# EAGLE board Mother-panelized (EAGLE 7.4.0)
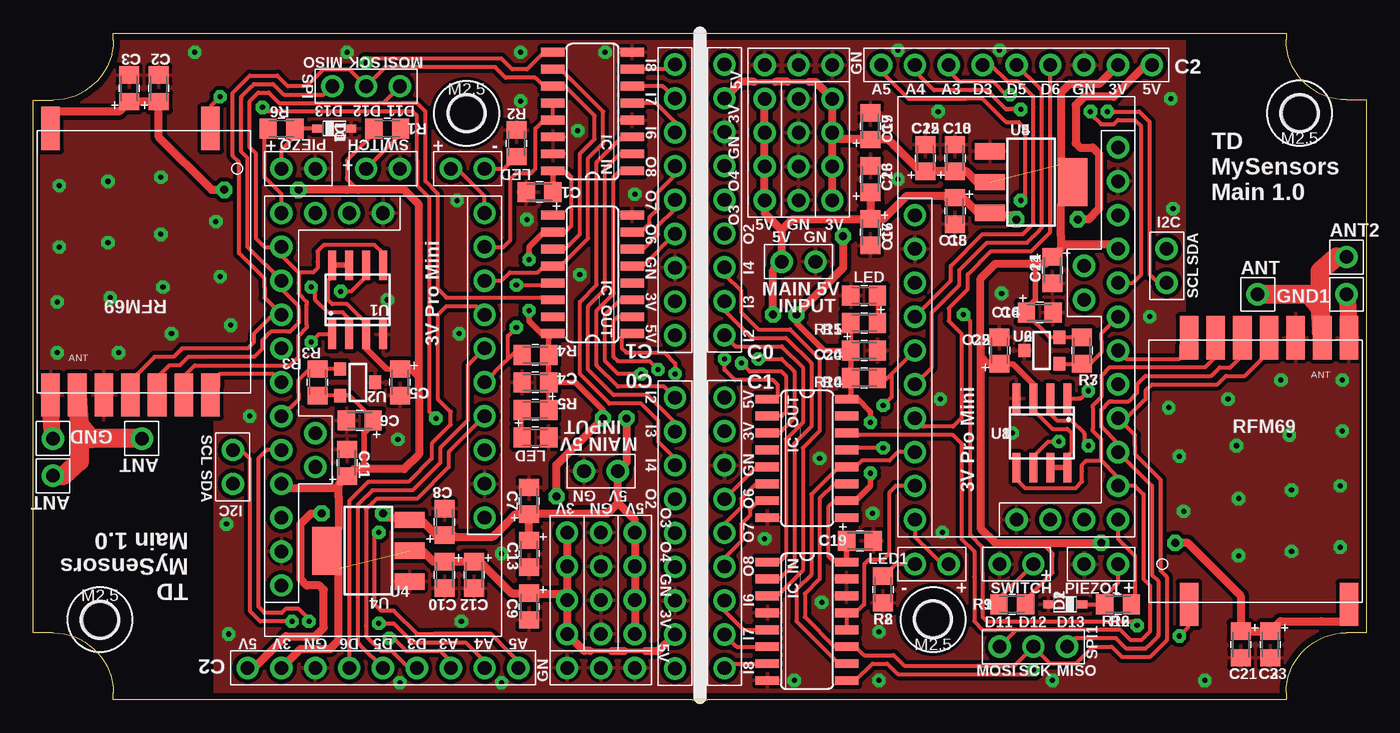
[diagram p0: board, top side]
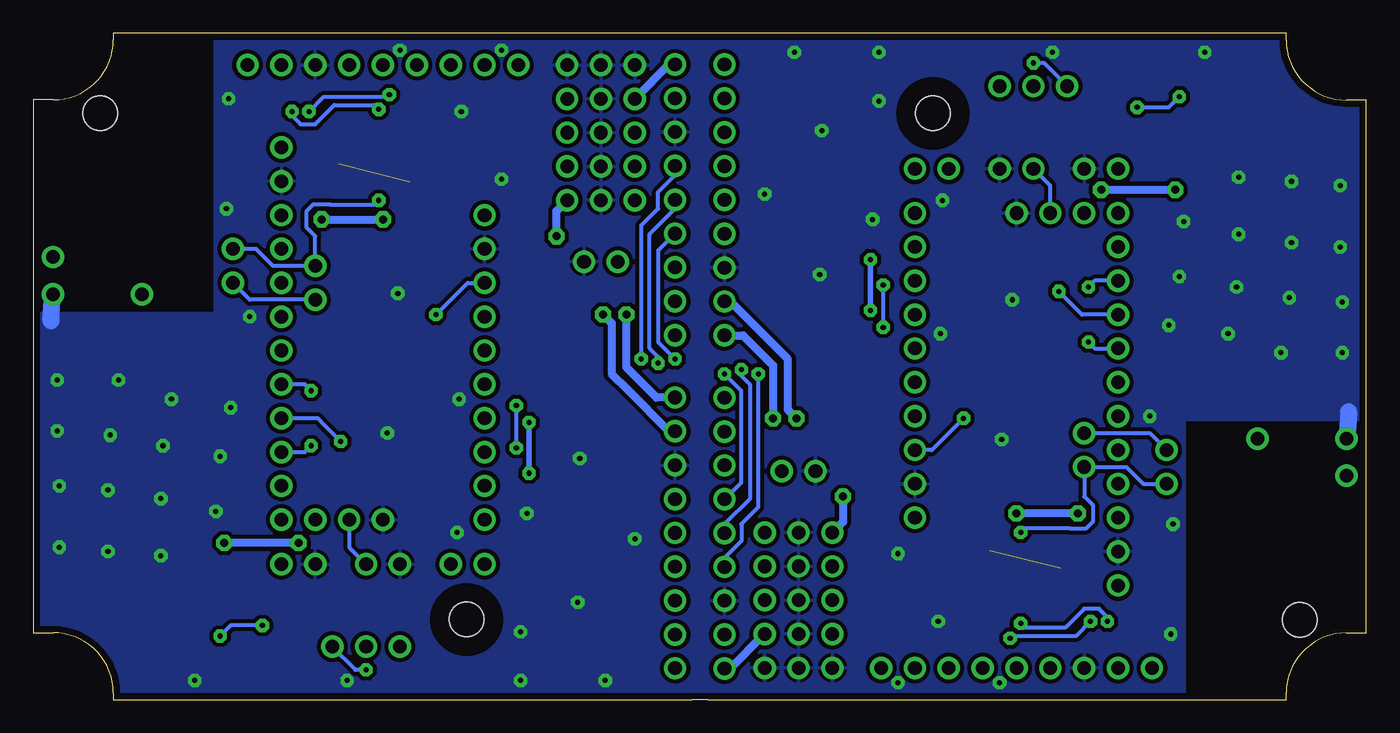
[diagram p1: board, bottom side, seen from below]

Size 100 x 50 mm. Coordinates in mm from the lower left corner, seen from the top.
Outline: 6,49.49 arc-90 1.5,44.99 0,44.99 0,4.99 1.5,4.99 arc-90 6,0.49 6,0 49.41,0 50.59,0 94,0 94,0.51 arc-90 98.5,5.01 100,5.01 100,45.01 98.5,45.01 arc-90 94,49.51 94,50 50.59,50 49.41,50 6,50 6,49.49
Copper layers (1*2*15*16): Top 0.035mm / dielectric 0.2mm / layer 2 0.035mm / dielectric 1.2mm / layer 15 0.035mm / dielectric 0.2mm / Bottom 0.035mm
Design rules "Elecrow_PCB_eagle_rule": minimum track width 6mil, minimum drill 12mil, track to track 6mil, track to pad 8mil, pad to pad 12mil, via to via 6mil, smd to smd 0mil, copper to edge 20mil, drill to drill 10mil, minimum pad ring 6mil, minimum via ring 6mil, stop-mask expansion 0mil, vias tented up to drill 100mil, thermal gap 10mil

## Footprints (pad centres in the part's own frame; a part is rotated, then mirrored left to right if it is on the bottom)
DUPONT_1 = drill 1.016 pad 1.676: 1 0,0
CAP_0805 = smd 1.3 x 1.5: 1 -1,0; 2 1,0
SOD323 = smd 0.8 x 0.6: A 1.25,0; C -1.25,0
HOLE_M2.5PAN_TIGHT = hole 2.6: 0,0
DUPONT_2 = drill 1.016 pad 1.676: 1 -1.27,0; 2 1.27,0
SO16 = smd 0.66 x 1.75: 1 -4.445,-2.973; 2 -3.175,-2.973; 3 -1.905,-2.973; 4 -0.635,-2.973; 5 0.635,-2.973; 6 1.905,-2.973; 7 3.175,-2.973; 8 4.445,-2.973; 9 4.445,2.973; 10 3.175,2.973; 11 1.905,2.973; 12 0.635,2.973; 13 -0.635,2.973; 14 -1.905,2.973; 15 -3.175,2.973; 16 -4.445,2.973
DUPONT_4 = drill 1.016 pad 1.676: 1 -3.81,0; 2 -1.27,0; 3 1.27,0; 4 3.81,0
DUPONT_3 = drill 1.016 pad 1.676: 1 -2.54,0; 2 0,0; 3 2.54,0
LED_0805 = smd 1.3 x 1.5: 1 -1,0; 2 1,0
R_0805 = smd 1.3 x 1.5: 1 -1,0; 2 1,0
SO-08 = smd 0.6 x 2.2: 1 -1.905,-2.6; 2 -0.635,-2.6; 3 0.635,-2.6; 4 1.905,-2.6; 5 1.905,2.6; 6 0.635,2.6; 7 -0.635,2.6; 8 -1.905,2.6
SOT23-3 = smd 1 x 0.9: 1 -1,-1.3; 2 1,-1.3; 3 0,1.3
PRO_MINI_CLONE = drill 1.016 pad 1.676: P$1 0,22.86; P$2 0,20.32; P$3 0,17.78; P$4 0,15.24; P$5 0,12.7; P$6 0,10.16; P$7 0,7.62; P$8 0,5.08; P$9 0,2.54; P$10 0,0; P$11 15.24,0; P$12 15.24,2.54; P$13 15.24,5.08; P$14 15.24,7.62; P$15 15.24,10.16; P$16 15.24,12.7; P$17 15.24,15.24; P$18 15.24,17.78; P$19 15.24,20.32; P$20 15.24,22.86; P$21 15.24,25.4; P$22 15.24,27.94; P$23 12.7,16.51; P$24 12.7,19.05; P$25 12.7,0; P$26 10.16,0; P$27 7.62,0
SOT223 = smd 1.219 x 2.235: 1 -2.311,-3.099; 2 0,-3.099; 3 2.311,-3.099 | smd 3.6 x 2.2: 4 0,3.099
DUPONT_MALE90_9 = drill 1.016 pad 1.676: 1 -10.16,0; 2 -7.62,0; 3 -5.08,0; 4 -2.54,0; 5 0,0; 6 2.54,0; 7 5.08,0; 8 7.62,0; 9 10.16,0
RFM69W_MS = smd 3.25 x 1.4: 2 -10,5; 8 -10,-7; 9 10,-7; 10 10,-5; 11 10,-3; 12 10,-1; 13 10,1; 14 10,3; 15 10,5
DUPONT_9 = drill 1.016 pad 1.676: 1 -10.16,0; 2 -7.62,0; 3 -5.08,0; 4 -2.54,0; 5 0,0; 6 2.54,0; 7 5.08,0; 8 7.62,0; 9 10.16,0

## Placement (x,y rotation side)
ANT  [DUPONT_1]  1.47,16.79 180 top
ANT1  [DUPONT_1]  8.14,19.58 180 top
ANT2  [DUPONT_1]  98.53,33.21 0 top
ANT3  [DUPONT_1]  91.86,30.42 0 top
C1  0.1uF  [CAP_0805]  37.98,38.09 180 top
C2  10uF  [CAP_0805]  9.41,45.87 90 top
C3  0.1uF  [CAP_0805]  7.19,45.87 90 top
C4  0.1uF  [CAP_0805]  37.67,23.81 180 top
C5  0.1uF  [CAP_0805]  27.51,23.81 270 top
C6  0.1uF  [CAP_0805]  24.49,20.95 180 top
C7  10uF  [CAP_0805]  37.19,14.92 90 top
C8  0.1uF  [CAP_0805]  30.84,13.33 90 top
C9  10uF  [CAP_0805]  37.19,6.98 270 top
C10  0.1uF  [CAP_0805]  30.84,9.36 270 top
C11  10uF  [CAP_0805]  23.54,17.77 90 top
C12  10uF  [CAP_0805]  33.06,9.36 270 top
C13  10uF  [CAP_0805]  37.19,10.95 270 top
C14  0.1uF  [CAP_0805]  75.51,29.05 0 top
C15  0.1uF  [CAP_0805]  69.16,36.67 270 top
C16  10uF  [CAP_0805]  62.81,35.08 270 top
C17  10uF  [CAP_0805]  62.81,43.02 90 top
C18  0.1uF  [CAP_0805]  69.16,40.64 90 top
C19  0.1uF  [CAP_0805]  62.02,11.91 0 top
C20  0.1uF  [CAP_0805]  62.33,26.19 0 top
C21  10uF  [CAP_0805]  90.59,4.13 270 top
C22  0.1uF  [CAP_0805]  72.49,26.19 90 top
C23  0.1uF  [CAP_0805]  92.81,4.13 270 top
C24  10uF  [CAP_0805]  76.46,32.23 270 top
C25  10uF  [CAP_0805]  66.94,40.64 90 top
C26  10uF  [CAP_0805]  62.81,39.05 90 top
D1  [SOD323]  22.59,42.86 0 top
D2  [SOD323]  77.41,7.14 180 top
GND  [DUPONT_1]  1.47,19.58 180 top
GND1  [DUPONT_1]  98.53,30.42 0 top
H1  HOLE_MOUNTING_M2.5_TIGHT  [HOLE_M2.5PAN_TIGHT]  32.5,43.99 180 top
H2  HOLE_MOUNTING_M2.5_TIGHT  [HOLE_M2.5PAN_TIGHT]  5,5.99 180 top
H3  HOLE_MOUNTING_M2.5_TIGHT  [HOLE_M2.5PAN_TIGHT]  95,44.01 0 top
H4  HOLE_MOUNTING_M2.5_TIGHT  [HOLE_M2.5PAN_TIGHT]  67.5,6.01 0 top
I2C  [DUPONT_2]  14.97,17.46 270 top
I2C1  [DUPONT_2]  85.03,32.54 90 top
IC_IN  [SO16]  41.95,44.13 90 top
IC_IN1  [SO16]  58.05,5.87 270 top
IC_OUT  [SO16]  41.95,31.9 90 top
IC_OUT1  [SO16]  58.05,18.1 270 top
J3V1  [DUPONT_4]  40.05,8.72 90 top
J3V2  [DUPONT_4]  59.95,41.27 270 top
J5V  [DUPONT_4]  45.13,8.72 270 top
J5V1  [DUPONT_4]  54.87,41.27 90 top
JGN1  [DUPONT_4]  42.59,8.72 270 top
JGN2  [DUPONT_3]  42.59,2.38 180 top
JGN3  [DUPONT_3]  57.41,47.62 0 top
JGN4  [DUPONT_4]  57.41,41.27 90 top
JINP  [DUPONT_2]  42.59,17.14 180 top
JINP1  [DUPONT_2]  57.41,32.86 0 top
LED  [DUPONT_2]  32.59,39.84 0 top
LED1  [DUPONT_2]  67.41,10.16 180 top
LED_SYS  [LED_0805]  37.67,19.68 0 top
LED_SYS1  [LED_0805]  62.33,30.32 180 top
PIEZO  [DUPONT_2]  19.89,39.84 0 top
PIEZO1  [DUPONT_2]  80.11,10.16 180 top
R1  10K  [R_0805]  26.55,42.86 0 top
R2  1K  [R_0805]  36.24,41.74 270 top
R3  4.7K  [R_0805]  21.32,23.81 270 top
R4  10K  [R_0805]  37.67,25.87 180 top
R5  1K  [R_0805]  37.67,21.74 180 top
R6  220  [R_0805]  18.62,42.86 0 top
R7  4.7K  [R_0805]  78.68,26.19 90 top
R8  1K  [R_0805]  63.76,8.26 90 top
R9  10K  [R_0805]  73.44,7.14 180 top
R10  10K  [R_0805]  62.33,24.13 0 top
R11  1K  [R_0805]  62.33,28.26 0 top
R12  220  [R_0805]  81.38,7.14 180 top
SPI  [DUPONT_3]  24.97,46.03 180 top
SPI1  [DUPONT_3]  75.03,3.97 0 top
SWITCH  [DUPONT_2]  26.24,39.84 0 top
SWITCH1  [DUPONT_2]  73.76,10.16 180 top
U1  [SO-08]  24.33,30 0 top
U2  [SOT23-3]  24.33,23.81 270 top
U3  [PRO_MINI_CLONE]  33.86,36.51 180 top
U4  AMS1117  [SOT223]  25.13,11.17 90 top
U5  AMS1117  [SOT223]  74.87,38.83 270 top
U6  [SOT23-3]  75.67,26.19 90 top
U7  [PRO_MINI_CLONE]  66.14,13.49 0 top
U8  [SO-08]  75.67,20 180 top
U$1  [DUPONT_MALE90_9]  48.15,37.49 90 top
U$2  RADIO_RFM69W_MS  [RFM69W_MS]  8.3,32.85 270 top
U$3  [DUPONT_MALE90_9]  48.15,12.49 90 top
U$4  [DUPONT_9]  26.24,2.38 0 top
U$5  RADIO_RFM69W_MS  [RFM69W_MS]  91.7,17.14 90 top
U$6  [DUPONT_MALE90_9]  51.85,12.51 270 top
U$7  [DUPONT_MALE90_9]  51.85,37.51 270 top
U$8  [DUPONT_9]  73.76,47.62 180 top

## Library data of the parts
ANT ANT1-ANT3 C1-C26 D1 D2 GND GND1 H1-H4 I2C I2C1 IC_IN IC_IN1 IC_OUT IC_OUT1 J3V1 J3V2 J5V J5V1 JGN1-JGN4 JINP JINP1 LED LED1 LED_SYS LED_SYS1 PIEZO PIEZO1 R1-R12 SPI SPI1 SWITCH SWITCH1 U1-U8 U$1-U$8 = TD22057

## Nets
+3V1: C14.1 C17.1 C18.1 C19.1 C20.1 C21.1 C22.1 C23.1 C24.1 C25.1 IC_IN1.16 IC_OUT1.10 IC_OUT1.16 J3V2.1 J3V2.2 J3V2.3 J3V2.4 R7.2 R9.1 R10.1 R11.1 U5.2 U5.4 U6.2 U7.P$19 U8.3 U8.7 U8.8 U$5.8 U$6.2 U$7.2 U$8.2
+3V3: C1.1 C2.1 C3.1 C4.1 C5.1 C6.1 C9.1 C10.1 C11.1 C12.1 IC_IN.16 IC_OUT.10 IC_OUT.16 J3V1.1 J3V1.2 J3V1.3 J3V1.4 R1.1 R3.2 R4.1 R5.1 U1.3 U1.7 U1.8 U2.2 U3.P$19 U4.2 U4.4 U$1.2 U$2.8 U$3.2 U$4.2
+5V: C7.1 C8.1 C13.1 J5V.1 J5V.2 J5V.3 J5V.4 JINP.1 U4.3 U$1.1 U$3.1 U$4.1
+5V1: C15.1 C16.1 C26.1 J5V1.1 J5V1.2 J5V1.3 J5V1.4 JINP1.1 U5.3 U$6.1 U$7.1 U$8.1
ANALOG1: U7.P$18 U$8.7
ANALOG3: U3.P$18 U$4.7
CRYPT: R3.1 U2.1 U3.P$17
CRYPT1: R7.1 U6.1 U7.P$17
GND: C1.2 C2.2 C3.2 C4.2 C5.2 C6.2 C7.2 C8.2 C9.2 C10.2 C11.2 C12.2 C13.2 D1.A GND.1 IC_IN.4 IC_IN.8 IC_IN.14 IC_IN.15 IC_OUT.8 JGN1.1 JGN1.2 JGN1.3 JGN1.4 JGN2.1 JGN2.2 JGN2.3 JINP.2 LED_SYS.2 PIEZO.2 R2.1 SWITCH.2 U1.4 U2.3 U3.P$2 U3.P$21 U3.P$27 U4.1 U$1.3 U$2.9 U$2.11 U$3.3 U$4.3
GND1: C14.2 C15.2 C16.2 C17.2 C18.2 C19.2 C20.2 C21.2 C22.2 C23.2 C24.2 C25.2 C26.2 D2.A GND1.1 IC_IN1.4 IC_IN1.8 IC_IN1.14 IC_IN1.15 IC_OUT1.8 JGN3.1 JGN3.2 JGN3.3 JGN4.1 JGN4.2 JGN4.3 JGN4.4 JINP1.2 LED_SYS1.2 PIEZO1.2 R8.1 SWITCH1.2 U5.1 U6.3 U7.P$2 U7.P$21 U7.P$27 U8.4 U$5.9 U$5.11 U$6.3 U$7.3 U$8.3
INP1: IC_IN1.5 U$6.7
INP2: IC_IN.1 U$3.9
INP3: IC_IN.2 U$3.8
INP4: IC_IN.3 U$3.7
INP5: IC_IN1.7 U$6.9
INP6: IC_IN.5 U$1.7
INP7: IC_IN.6 U$1.8
INP8: IC_IN.7 U$1.9
INP9: IC_IN1.3 U$7.7
INP10: IC_IN1.1 U$7.9
INP11: IC_IN1.6 U$6.8
INP12: IC_IN1.2 U$7.8
IRQ: U3.P$4 U$4.6
IRQ1: U7.P$4 U$8.6
LED: LED.1 U3.P$10
LED1: LED1.1 U7.P$10
MEMORY_CS: U1.1 U3.P$15
MEMORY_CS1: U7.P$15 U8.1
MISO: IC_IN.9 SPI.3 U1.2 U3.P$13 U$2.13
MISO1: IC_IN1.9 SPI1.3 U7.P$13 U8.2 U$5.13
MOSI: IC_OUT.14 SPI.1 U1.5 U3.P$12 U$2.14
MOSI1: IC_OUT1.14 SPI1.1 U7.P$12 U8.5 U$5.14
N$1: LED.2 R2.2
N$2: LED_SYS.1 R5.2
N$3: D1.C PIEZO.1 R6.2
N$4: ANT2.1 ANT3.1 U$5.10
N$5: LED1.2 R8.2
N$6: LED_SYS1.1 R11.2
N$7: D2.C PIEZO1.1 R12.2
N$11: ANT1.1 ANT.1 U$2.10
OUT1: IC_OUT1.1 U$7.6
OUT2: IC_OUT.1 U$3.6
OUT3: IC_OUT.2 U$3.5
OUT4: IC_OUT.3 U$3.4
OUT5: IC_OUT1.2 U$7.5
OUT6: IC_OUT.5 U$1.4
OUT7: IC_OUT.6 U$1.5
OUT8: IC_OUT.7 U$1.6
OUT9: IC_OUT1.3 U$7.4
OUT10: IC_OUT1.5 U$6.4
OUT11: IC_OUT1.7 U$6.6
OUT12: IC_OUT1.6 U$6.5
PIEZO: R6.1 U3.P$11
PIEZO1: R12.1 U7.P$11
PWM1: U3.P$6 U$4.5
PWM2: U3.P$7 U$4.4
PWM3: U7.P$7 U$8.4
PWM4: U7.P$6 U$8.5
RADIO_CS: U3.P$16 U$2.15
RADIO_CS1: U7.P$16 U$5.15
RADIO_IRQ: U3.P$3 U$2.2
RADIO_IRQ1: U7.P$3 U$5.2
RAW: U3.P$22
RAW1: U7.P$22
SCK: IC_IN.11 IC_OUT.11 SPI.2 U1.6 U3.P$14 U$2.12
SCK1: IC_IN1.11 IC_OUT1.11 SPI1.2 U7.P$14 U8.6 U$5.12
SCL: I2C.2 U3.P$24 U$4.9
SCL1: I2C1.2 U7.P$24 U$8.9
SDA: I2C.1 U3.P$23 U$4.8
SDA1: I2C1.1 U7.P$23 U$8.8
SHIFT_CS: IC_IN.10 IC_OUT.12 U3.P$8
SHIFT_CS1: IC_IN1.10 IC_OUT1.12 U7.P$8
SHIFT_IN_LOAD: IC_IN.12 IC_IN.13 U3.P$9
SHIFT_IN_LOAD1: IC_IN1.12 IC_IN1.13 U7.P$9
SHIFT_OUT_ENABLE: IC_OUT.13 R4.2 U3.P$5
SHIFT_OUT_ENABLE1: IC_OUT1.13 R10.2 U7.P$5
SWITCH: R1.2 SWITCH.1 U3.P$26
SWITCH1: R9.2 SWITCH1.1 U7.P$26

## Tracks (layer width: path | path; a pad name or v marks a point on that pad's centre or on a via)
+3V1  (via drill 0.38 pad 0.99, 0.6 pad 1.21)  (1 unrouted)
  Top 0.305: U8.3 75.03,21.75 76.46,20.32 77.57,20.32 77.89,20 77.89,18.57 77.57,18.26 U8.8 | IC_OUT1.10 60.11,14.92 59.63,14.45 59.63,10.79 60.04,10.39 60.95,10.39 | R9.1 74.6,7.67 76.46,9.53 76.46,10.79 76.46,10.95 75.67,11.75 | 74.51,29.32 C14.1 74.51,28.94 76.14,27.3 76.25,27.19 U6.2 | 76.92,27.15 U6.2 | U6.2 R7.2 | R11.1 C20.1
  Top 0.356: 58.2,46.35 56.62,46.35 | 55.66,46.35 54.08,46.35
  Top 0.406: U8.8 U8.7 | v62.81,16.99 62.81,16.03 61.7,14.92 IC_OUT1.10 | 61.11,10.41 IC_IN1.16 | 60.95,10.39 IC_IN1.16 | v62.81,20.8 62.81,21.59 61.86,22.54 IC_OUT1.16 61.33,22.86 R10.1 C20.1 59.32,26.19 57.25,28.26 v57.25,28.89 | C19.1 IC_IN1.16 | C14.1 74.51,29.32 | 74.51,29.32 74.51,29.48 | 74.51,29.32 75.19,30 75.19,32.38 75.51,32.7 | U8.3 75.03,23.65 73.49,25.19 C22.1 71.75,25.19 71.06,25.88
  Top 0.61: J3V2.4 J3V2.3 59.95,42.07 J3V2.2 | J3V2.2 J3V2.1 58.68,46.35 58.2,46.35 | 98.61,7.3 U$5.8 98.84,7 98.84,6.51 98.21,5.87 96.62,5.87 93.56,5.87 C23.1 C21.1 90.59,7.78 86.62,11.75 v85.67,11.75 | 77.89,39.69 77.89,39.37 | 77.89,39.37 77.89,38.91 U5.4 | U5.4 77.73,38.59 77.73,37.78 77.1,37.15 77.1,34.77 77.1,33.97 | 77.25,38.11 U5.4 | v60.74,34.77 60.74,32.38 v57.25,28.89 | U5.2 70.81,38.83 70,39.64 C18.1 C25.1 66.51,39.64 64.56,41.59 64.13,42.02 C17.1 62.76,42.07 60.43,42.07 J3V2.2 | v80.11,11.75 76.46,11.75 75.67,11.75 72.17,11.75 71.06,12.86 71.06,25.88 71.06,26.04 71.06,27.15 71.06,31.59 72.17,32.7 75.03,32.7 75.35,32.7 75.51,32.7 75.94,32.7 C24.1 77.1,33.86 77.1,33.97 | U7.P$19 81.06,34.13 77.57,34.13 77.25,34.13 77.1,33.97 | U$8.2 79.95,46.2 77.73,46.2 77.1,45.56 77.1,40.16 77.89,39.37 | 56.62,46.35 55.66,46.35 | 54.08,46.35 53.08,46.35 U$7.2
  Bottom 0.406: v62.81,20.8 v62.81,16.99
  Bottom 0.61: v80.11,11.75 v85.67,11.75 | U$6.2 52.3,20.13 55.35,23.18 56.62,24.45 56.62,28.1 56.62,28.26 v57.25,28.89 | v60.74,34.77 60.74,36.67 J3V2.4
+3V3  (via drill 0.38 pad 0.99, 0.6 pad 1.21)  (1 unrouted)
  Top 0.305: U1.3 24.97,28.25 23.54,29.68 22.43,29.68 22.11,30 22.11,31.43 22.43,31.74 U1.8 | IC_OUT.10 39.89,35.08 40.37,35.55 40.37,39.2 39.96,39.61 39.05,39.61 | R1.1 25.4,42.33 23.54,40.48 23.54,39.2 23.54,39.05 24.33,38.25 | 25.49,20.68 C6.1 25.49,21.06 23.86,22.7 23.75,22.81 U2.2 | 23.08,22.85 U2.2 | U2.2 R3.2 | R5.1 C4.1
  Top 0.356: 41.8,3.65 43.38,3.65 | 44.34,3.65 45.92,3.65
  Top 0.406: U1.8 U1.7 | v37.19,33.01 37.19,33.97 38.3,35.08 IC_OUT.10 | 38.89,39.59 IC_IN.16 | 39.05,39.61 IC_IN.16 | v37.19,29.2 37.19,28.41 38.14,27.46 IC_OUT.16 38.67,27.14 R4.1 C4.1 40.68,23.81 42.75,21.74 v42.75,21.11 | C1.1 IC_IN.16 | C6.1 25.49,20.68 | 25.49,20.68 25.49,20.52 | 25.49,20.68 24.81,20 24.81,17.61 24.49,17.3 | U1.3 24.97,26.35 26.51,24.81 C5.1 28.25,24.81 28.94,24.12
  Top 0.61: J3V1.4 J3V1.3 40.05,7.93 J3V1.2 | J3V1.2 J3V1.1 41.32,3.65 41.8,3.65 | 1.39,42.7 U$2.8 1.16,43 1.16,43.49 1.79,44.13 3.38,44.13 6.44,44.13 C3.1 C2.1 9.41,42.22 13.38,38.25 v14.33,38.25 | 22.11,10.31 22.11,10.63 | 22.11,10.63 22.11,11.09 U4.4 | U4.4 22.27,11.41 22.27,12.22 22.9,12.85 22.9,15.23 22.9,16.03 | 22.75,11.89 U4.4 | v39.26,15.23 39.26,17.61 v42.75,21.11 | U4.2 29.19,11.17 30,10.36 C10.1 C12.1 33.49,10.36 35.45,8.41 35.87,7.98 C9.1 37.24,7.93 39.57,7.93 J3V1.2 | v19.89,38.25 23.54,38.25 24.33,38.25 27.82,38.25 28.94,37.14 28.94,24.12 28.94,23.96 28.94,22.85 28.94,18.41 27.82,17.3 24.97,17.3 24.65,17.3 24.49,17.3 24.06,17.3 C11.1 22.9,16.14 22.9,16.03 | U3.P$19 18.93,15.87 22.43,15.87 22.75,15.87 22.9,16.03 | U$4.2 20.05,3.8 22.27,3.8 22.9,4.44 22.9,9.84 22.11,10.63 | 43.38,3.65 44.34,3.65 | 45.92,3.65 46.92,3.65 U$3.2
  Bottom 0.406: v37.19,29.2 v37.19,33.01
  Bottom 0.61: v19.89,38.25 v14.33,38.25 | U$1.2 47.7,29.87 44.65,26.82 43.38,25.55 43.38,21.9 43.38,21.74 v42.75,21.11 | v39.26,15.23 39.26,13.33 J3V1.4
+5V  (via drill 0.6 pad 1.21)
  Top 0.61: J5V.2 J5V.3 J5V.4 J5V.1 45.13,13.49 43.86,14.76 | 43.86,14.76 JINP.1 44.49,17.77 v44.49,21.11 | v21.63,13.96 20.84,13.96 20.05,13.17 20.05,9.04 20.52,8.57 21.48,8.57 21.79,8.25 21.79,5.39 21.63,5.23 21.16,4.76 18.93,4.76 16.55,2.38 U$4.1 | v26.24,13.96 26.55,13.65 28.06,13.65 U4.3 29.09,13.49 30.25,12.33 C8.1 31.52,12.33 31.64,12.22 34.49,12.22 35.6,13.33 36.19,13.92 C7.1 | 43.86,14.76 43.06,13.96 37.56,13.96 C7.1 | C13.1 C7.1
  Bottom 0.61: U$1.1 46.75,27.33 44.49,25.08 v44.49,21.11 | v21.63,13.96 v26.24,13.96 | U$3.1 47.71,2.33 J5V.4
+5V1  (via drill 0.6 pad 1.21)
  Top 0.61: J5V1.2 J5V1.3 J5V1.4 J5V1.1 54.87,36.51 56.14,35.24 | 56.14,35.24 JINP1.1 55.51,32.23 v55.51,28.89 | v78.37,36.04 79.16,36.04 79.95,36.83 79.95,40.96 79.48,41.43 78.53,41.43 78.21,41.75 78.21,44.61 78.37,44.77 78.84,45.24 81.06,45.24 83.45,47.62 U$8.1 | v73.76,36.04 73.44,36.35 71.94,36.35 U5.3 70.91,36.51 69.75,37.67 C15.1 68.48,37.67 68.36,37.78 65.51,37.78 64.4,36.67 63.81,36.08 C16.1 | 56.14,35.24 56.94,36.04 62.44,36.04 C16.1 | C26.1 C16.1
  Bottom 0.61: U$6.1 53.25,22.67 55.51,24.92 v55.51,28.89 | v78.37,36.04 v73.76,36.04 | U$7.1 52.29,47.67 J5V1.4
ANALOG1  (via drill 0.38 pad 0.99)
  Top 0.305: v79.32,44.13 79.32,43.97 80.11,43.18 81.06,43.18 81.38,43.5 82.65,43.5 83.13,43.02 83.13,31.91 82.49,31.27 U7.P$18 | U$8.7 68.68,47.15 69.48,46.35 69.64,46.35 70.75,46.35 72.02,46.35 72.97,45.4 v73.29,45.4
  Bottom 0.305: v79.32,44.13 78.21,45.24 73.44,45.24 v73.29,45.4
ANALOG3  (via drill 0.38 pad 0.99)
  Top 0.305: v20.68,5.87 20.68,6.03 19.89,6.82 18.93,6.82 18.62,6.5 17.35,6.5 16.87,6.98 16.87,18.09 17.51,18.73 U3.P$18 | U$4.7 31.32,2.85 30.52,3.65 30.36,3.65 29.25,3.65 27.98,3.65 27.03,4.6 v26.71,4.6
  Bottom 0.305: v20.68,5.87 21.79,4.76 26.55,4.76 v26.71,4.6
CRYPT
  Top 0.305: U2.1 R3.1 | R3.1 21.05,24.81 | U3.P$17 19.89,22.54 19.89,23.01 19.89,23.96 20.84,24.92 21.2,24.92 R3.1
CRYPT1
  Top 0.305: U6.1 R7.1 | R7.1 78.95,25.19 | U7.P$17 80.11,27.46 80.11,26.99 80.11,26.04 79.16,25.08 78.8,25.08 R7.1
GND  (via drill 0.38 pad 0.99)
  Top 1.27: GND.1 1.31,21.58
  Bottom 1.27: 1.31,21.58 1.47,19.52
  other vias: 6.39,26.03 1.79,26.03 1.79,29.84 5.76,30.16 9.73,30.95 1.95,38.57 5.6,38.89 9.57,39.2 26.55,30 27.35,19.52 31.95,27.46 1.95,33.97 5.6,34.28 9.57,34.92 14.01,31.74 13.7,35.87 12.11,48.57 45.13,37.94 42.91,48.57 16.24,21.27 37.03,36.03 31.79,37.46 32.11,5.87 40.84,42.7 14.49,13.17 14.65,4.92 23.54,48.57 35.13,1.26 36.56,48.57 10.36,27.46 14.81,28.09 27.51,1.26 36.56,44.92 41,31.9 35.13,10.95
  pour Top (isolate 0.305): 50.53,0 50.53,50 5.96,50 5.96,49.05 arc-92 1.79,45.06 0,45.06 0,21.02 13.65,21.02 13.65,0
  pour Bottom (isolate 0.305): 50.53,0 50.53,50 5.96,50 5.96,49.05 arc-92 1.79,45.06 0,45.06 0,21.02 13.65,21.02 13.65,0
GND1  (via drill 0.38 pad 0.99)
  Top 1.27: GND1.1 98.69,28.42
  Bottom 1.27: 98.69,28.42 98.53,30.48
  other vias: 93.61,23.97 98.21,23.97 98.21,20.16 94.24,19.84 90.27,19.05 98.05,11.43 94.4,11.11 90.43,10.79 73.44,20 72.65,30.48 68.05,22.54 98.05,16.03 94.4,15.72 90.43,15.08 85.99,18.26 86.3,14.13 87.89,1.43 54.87,12.06 57.09,1.43 83.76,28.73 62.97,13.97 68.21,12.54 67.89,44.13 59.16,7.3 85.51,36.83 85.35,45.09 76.46,1.43 64.87,48.74 63.44,1.43 89.64,22.54 85.19,21.91 72.49,48.74 63.44,5.08 59,18.1 64.87,39.05
  pour Top (isolate 0.305): 50.59,50 50.59,0 94.04,0 94.04,0.95 arc-92 98.21,4.94 100,4.94 100,28.98 86.35,28.98 86.35,50
  pour Bottom (isolate 0.305): 50.59,50 50.59,0 94.04,0 94.04,0.95 arc-92 98.21,4.94 100,4.94 100,28.98 86.35,28.98 86.35,50
INP1
  Top 0.305: U$6.7 51.85,6.67 53.28,5.24 IC_IN1.5
INP2
  Top 0.305: IC_IN.1 44.02,39.68 43.54,39.2 43.54,30.47 42.27,29.2 42.27,25.08 43.86,23.49 47.31,23.49 U$3.9
INP3
  Top 0.305: 48.15,20.47 U$3.8 48.15,20.79 46.08,22.85 43.54,22.85 41.64,24.76 41.64,29.52 42.91,30.79 42.91,39.84 44.02,40.95 IC_IN.2
INP4
  Top 0.305: U$3.7 48.15,18.09 46.88,19.36 46.88,20.95 45.6,22.22 43.22,22.22 41,24.44 41,29.84 42.27,31.11 42.27,40.32 44.18,42.22 IC_IN.3
INP5
  Top 0.305: U$6.9 52.21,2.7 IC_IN1.7
INP6
  Top 0.305: U$1.7 48.15,43.33 46.72,44.76 IC_IN.5
INP7
  Top 0.305: U$1.8 47.23,46.03 IC_IN.6
INP8
  Top 0.305: U$1.9 47.79,47.3 IC_IN.7
INP9
  Top 0.305: U$7.7 51.85,31.91 53.12,30.64 53.12,29.05 54.4,27.78 56.78,27.78 59,25.56 59,20.16 57.73,18.89 57.73,9.68 55.82,7.78 IC_IN1.3
INP10
  Top 0.305: IC_IN1.1 55.98,10.32 56.46,10.79 56.46,19.53 57.73,20.8 57.73,24.92 56.14,26.51 52.69,26.51 U$7.9
INP11
  Top 0.305: U$6.8 52.77,3.97 IC_IN1.6
INP12
  Top 0.305: 51.85,29.53 U$7.8 51.85,29.21 53.92,27.15 56.46,27.15 58.36,25.24 58.36,20.48 57.09,19.21 57.09,10.16 55.98,9.05 IC_IN1.2
IRQ
  Top 0.305: U3.P$4 31.16,18.57 31.16,17.46 28.78,15.07 25.76,15.07 25.44,14.76 25.13,14.44 24.97,14.28 24.97,5.55 24.97,4.76 25.13,4.6 26.08,3.65 26.71,3.65 26.87,3.65 28.14,2.38 U$4.6
IRQ1
  Top 0.305: U7.P$4 68.84,31.43 68.84,32.54 71.22,34.92 74.24,34.92 74.56,35.24 74.87,35.56 75.03,35.72 75.03,44.45 75.03,45.24 74.87,45.4 73.92,46.35 73.29,46.35 73.13,46.35 71.86,47.62 U$8.6
LED
  Top 0.305: U3.P$10 33.86,37.78 31.79,39.84 LED.1
LED1
  Top 0.305: U7.P$10 66.14,12.22 68.21,10.16 LED1.1
MEMORY_CS  (via drill 0.38 pad 0.99)
  Top 0.305: U1.1 21.57,27.4 21.41,27.4 v20.84,26.82
  Bottom 0.305: v20.84,26.82 20.36,26.35 U3.P$15
MEMORY_CS1  (via drill 0.38 pad 0.99)
  Top 0.305: U8.1 78.43,22.6 78.58,22.6 v79.16,23.18
  Bottom 0.305: v79.16,23.18 79.64,23.65 U7.P$15
MISO  (via drill 0.38 pad 0.99)
  Top 0.305: U1.2 23.7,28.57 23.22,29.05 22.11,29.05 21.16,30 21.16,30.63 v20.84,30.95 | U$2.13 9.3,24.17 10.2,25.08 11,25.08 11.63,25.71 16.55,25.71 17.19,26.35 17.19,26.98 17.82,27.62 19.09,27.62 19.25,27.62 19.89,28.25 19.89,28.41 19.89,29.36 19.89,29.52 18.62,30.79 U3.P$13 16.08,33.97 16.08,40.48 16.08,40.63 15.6,41.11 15.6,45.08 15.6,45.24 16.39,46.03 16.55,46.19 17.98,46.19 18.78,45.4 21.79,45.4 SPI.3 | IC_IN.9 38.3,48.57 37.03,47.3 35.92,47.3 35.13,48.09 25.92,48.09 25.29,48.09 v24.97,47.78
  Bottom 0.305: v24.97,47.78 24.17,47.78 SPI.3 | U3.P$13 20.36,31.43 v20.84,30.95
MISO1  (via drill 0.38 pad 0.99)
  Top 0.305: U8.2 76.3,21.43 76.78,20.95 77.89,20.95 78.84,20 78.84,19.37 v79.16,19.05 | U$5.13 90.7,25.83 89.8,24.92 89,24.92 88.37,24.29 83.45,24.29 82.81,23.65 82.81,23.02 82.18,22.38 80.91,22.38 80.75,22.38 80.11,21.75 80.11,21.59 80.11,20.64 80.11,20.48 81.38,19.21 U7.P$13 83.92,16.03 83.92,9.53 83.92,9.37 84.4,8.89 84.4,4.92 84.4,4.76 83.61,3.97 83.45,3.81 82.02,3.81 81.22,4.6 78.21,4.6 SPI1.3 | IC_IN1.9 61.7,1.43 62.97,2.7 64.08,2.7 64.87,1.91 74.08,1.91 74.72,1.91 v75.03,2.22
  Bottom 0.305: v75.03,2.22 75.83,2.22 SPI1.3 | U7.P$13 79.64,18.57 v79.16,19.05
MOSI
  Top 0.305: U$2.14 11.31,22.81 11.31,24.28 12.11,25.08 19.09,25.08 19.25,25.08 19.89,25.71 19.89,25.87 19.89,27.3 20.52,27.93 20.52,28.09 20.52,29.68 20.52,29.84 19.89,30.47 19.89,31.27 19.89,32.06 | U1.5 26.24,33.49 25.6,34.12 21.79,34.12 21.32,33.65 21.32,32.85 21.32,32.38 21,32.06 19.89,32.06 | 38.82,30.16 IC_OUT.14 38.4,29.84 38.09,30.16 31,30.16 30.36,30.79 30.36,37.94 29.41,38.89 29.41,40.79 29.41,44.13 28.78,44.76 27.67,44.76 26.24,44.76 | SPI.1 26.24,44.76 | 26.24,44.76 25.92,44.76 21.63,44.76 18.46,44.76 17.66,45.55 16.87,45.55 16.24,44.92 16.24,41.43 16.71,40.95 16.71,34.6 17.35,33.97 U3.P$12 18.62,33.33 19.89,32.06
MOSI1
  Top 0.305: U$5.14 88.69,27.19 88.69,25.72 87.89,24.92 80.91,24.92 80.75,24.92 80.11,24.29 80.11,24.13 80.11,22.7 79.48,22.07 79.48,21.91 79.48,20.32 79.48,20.16 80.11,19.53 80.11,18.73 80.11,17.94 | U8.5 73.76,16.51 74.4,15.88 78.21,15.88 78.68,16.35 78.68,17.14 78.68,17.62 79,17.94 80.11,17.94 | 61.18,19.84 IC_OUT1.14 61.6,20.16 61.91,19.84 69,19.84 69.64,19.21 69.64,12.06 70.59,11.11 70.59,9.21 70.59,5.87 71.22,5.24 72.33,5.24 73.76,5.24 | SPI1.1 73.76,5.24 | 73.76,5.24 74.08,5.24 78.37,5.24 81.54,5.24 82.33,4.45 83.13,4.45 83.76,5.08 83.76,8.57 83.29,9.05 83.29,15.4 82.65,16.03 U7.P$12 81.38,16.67 80.11,17.94
N$1
  Top 0.305: LED.2 35.33,39.84 R2.2
N$2
  Top 0.305: LED_SYS.1 R5.2
N$3
  Top 0.305: D1.C R6.2 19.57,42.81 19.57,42.22 18.62,41.27 PIEZO.1
N$4
  Top 1.422: U$5.10 96.54,29.37 | 96.54,29.37 96.54,32.15 97.77,33.21 ANT2.1 | ANT3.1 95.65,30.42 96.54,29.37
N$5
  Top 0.305: LED1.2 64.67,10.16 R8.2
N$6
  Top 0.305: LED_SYS1.1 R11.2
N$7
  Top 0.305: D2.C R12.2 80.43,7.19 80.43,7.78 81.38,8.73 PIEZO1.1
N$11
  Top 1.422: U$2.10 3.46,20.63 | 3.46,20.63 3.46,17.85 2.23,16.79 ANT.1 | ANT1.1 4.35,19.58 3.46,20.63
OUT1  (via drill 0.38 pad 0.99)
  Top 0.305: 55.51,22.54 IC_OUT1.1 55.66,22.54 55.82,22.7 55.82,23.65 55.51,23.97 52.65,23.97 51.85,24.77 v51.85,25.56
  Bottom 0.305: v51.85,25.56 53.12,26.83 53.12,33.7 U$7.6
OUT2  (via drill 0.38 pad 0.99)
  Top 0.305: 44.49,27.46 IC_OUT.1 44.34,27.46 44.18,27.3 44.18,26.35 44.49,26.03 47.35,26.03 48.15,25.23 v48.15,24.44
  Bottom 0.305: v48.15,24.44 46.88,23.17 46.88,16.3 U$3.6
OUT3  (via drill 0.38 pad 0.99)
  Top 0.305: IC_OUT.2 43.86,28.73 43.54,28.41 43.54,25.71 43.86,25.39 46.24,25.39 v46.88,24.76
  Bottom 0.305: v46.88,24.76 46.88,24.28 46.24,23.65 46.24,15.07 48.15,13.17 U$3.5
OUT4  (via drill 0.38 pad 0.99)
  Top 0.305: IC_OUT.3 44.02,30 42.91,28.89 42.91,25.39 43.86,24.44 v45.6,24.44
  Bottom 0.305: v45.6,24.44 45.6,14.44 46.88,13.17 46.88,11.9 48.15,10.63 U$3.4
OUT5  (via drill 0.38 pad 0.99)
  Top 0.305: IC_OUT1.2 56.14,21.27 56.46,21.59 56.46,24.29 56.14,24.61 53.76,24.61 v53.12,25.24
  Bottom 0.305: v53.12,25.24 53.12,25.72 53.76,26.35 53.76,34.92 51.85,36.83 U$7.5
OUT6
  Top 0.305: IC_OUT.5 45.73,32.54 U$1.4
OUT7
  Top 0.305: IC_OUT.6 45.76,33.81 46.88,34.92 46.88,35.55 48.15,36.82 U$1.5
OUT8
  Top 0.305: U$1.6 48.15,39.36 46.88,38.09 46.88,36.82 46.24,36.19 46.24,35.71 45.6,35.08 IC_OUT.7
OUT9  (via drill 0.38 pad 0.99)
  Top 0.305: IC_OUT1.3 55.98,20 57.09,21.11 57.09,24.61 56.14,25.56 v54.4,25.56
  Bottom 0.305: v54.4,25.56 54.4,35.56 53.12,36.83 53.12,38.1 51.85,39.37 U$7.4
OUT10
  Top 0.305: IC_OUT1.5 54.27,17.46 U$6.4
OUT11
  Top 0.305: U$6.6 51.85,10.64 53.12,11.91 53.12,13.18 53.76,13.81 53.76,14.29 54.4,14.92 IC_OUT1.7
OUT12
  Top 0.305: IC_OUT1.6 54.24,16.19 53.12,15.08 53.12,14.45 51.85,13.18 U$6.5
PIEZO
  Top 0.305: 17.35,42.74 R6.1 17.35,42.74 | U3.P$11 18.62,37.94 17.35,39.2 17.35,42.74
PIEZO1
  Top 0.305: 82.65,7.25 R12.1 82.65,7.25 | U7.P$11 81.38,12.06 82.65,10.79 82.65,7.25
PWM1
  Top 0.305: U3.P$6 32.59,25.08 32.59,20.95 30.52,18.89 30.52,17.77 28.46,15.71 25.44,15.71 24.49,14.76 24.33,14.6 24.33,4.92 24.33,4.28 24.49,4.12 U$4.5
PWM2
  Top 0.305: U3.P$7 33.22,29.52 31,29.52 30.36,28.89 30.36,22.54 31.32,21.58 31.32,20.63 29.89,19.2 29.89,18.09 28.14,16.34 25.13,16.34 23.86,15.07 23.7,14.92 U$4.4
PWM3
  Top 0.305: U7.P$7 66.78,20.48 69,20.48 69.64,21.11 69.64,27.46 68.68,28.42 68.68,29.37 70.11,30.8 70.11,31.91 71.86,33.66 74.87,33.66 76.14,34.92 76.3,35.08 U$8.4
PWM4
  Top 0.305: U7.P$6 67.41,24.92 67.41,29.05 69.48,31.11 69.48,32.23 71.54,34.29 74.56,34.29 75.51,35.24 75.67,35.4 75.67,45.09 75.67,45.72 75.51,45.88 U$8.5
RADIO_CS
  Top 0.305: U3.P$16 17.98,24.44 14.01,24.44 13.86,24.28 13.86,23.41 U$2.15
RADIO_CS1
  Top 0.305: U7.P$16 82.02,25.56 85.99,25.56 86.14,25.72 86.14,26.59 U$5.15
RADIO_IRQ  (via drill 0.38 pad 0.99)
  Top 0.305: 29.89,21.43 v30.21,21.11 29.73,21.58 29.73,37.62 28.78,38.57 28.78,40.48 28.78,43.81 28.46,44.13 27.19,44.13 21.32,44.13 17.51,44.13 v17.19,44.44 | U$2.2 13.38,42.94 13.38,44.6 v14.01,45.24
  Bottom 0.305: v30.21,21.11 32.59,18.73 U3.P$3 | v17.19,44.44 14.81,44.44 v14.01,45.24
RADIO_IRQ1  (via drill 0.38 pad 0.99)
  Top 0.305: 70.11,28.57 v69.79,28.89 70.27,28.42 70.27,12.38 71.22,11.43 71.22,9.53 71.22,6.19 71.54,5.87 72.81,5.87 78.68,5.87 82.49,5.87 v82.81,5.56 | U$5.2 86.62,7.07 86.62,5.4 v85.99,4.76
  Bottom 0.305: v69.79,28.89 67.41,31.27 U7.P$3 | v82.81,5.56 85.19,5.56 v85.99,4.76
SCK  (via drill 0.38 pad 0.99)
  Top 0.305: U1.6 24.97,31.74 23.86,30.63 v23.06,30.63 | 7.3,23.76 U$2.12 7.82,23.38 7.82,24.44 9.09,25.71 10.52,25.71 11.16,26.35 16.08,26.35 16.55,26.82 16.55,27.46 17.98,28.89 U3.P$14 17.35,30.16 17.35,30.95 17.35,31.59 15.44,33.49 15.44,40.16 15.44,40.32 14.97,40.79 14.97,45.55 16.24,46.83 18.3,46.83 19.09,46.03 20.52,46.03 21.79,47.3 21.95,47.3 23.38,47.3 | IC_OUT.11 39.89,33.81 41,34.92 41,40.95 42.11,42.06 42.11,43.81 39.89,46.03 IC_IN.11 38.3,46.03 37.67,46.67 35.45,46.67 34.65,47.46 26.4,47.46 SPI.2 23.7,47.3 23.38,47.3 | 23.06,47.3 23.38,47.3
  Bottom 0.305: v23.06,30.63 21.79,29.36 21.32,28.89 U3.P$14
SCK1  (via drill 0.38 pad 0.99)
  Top 0.305: U8.6 75.03,18.26 76.14,19.37 v76.94,19.37 | 92.7,26.24 U$5.12 92.18,26.62 92.18,25.56 90.91,24.29 89.48,24.29 88.84,23.65 83.92,23.65 83.45,23.18 83.45,22.54 82.02,21.11 U7.P$14 82.65,19.84 82.65,19.05 82.65,18.41 84.56,16.51 84.56,9.84 84.56,9.68 85.03,9.21 85.03,4.45 83.76,3.17 81.7,3.17 80.91,3.97 79.48,3.97 78.21,2.7 78.05,2.7 76.62,2.7 | IC_OUT1.11 60.11,16.19 59,15.08 59,9.05 57.89,7.94 57.89,6.19 60.11,3.97 IC_IN1.11 61.7,3.97 62.33,3.33 64.56,3.33 65.35,2.54 73.6,2.54 SPI1.2 76.3,2.7 76.62,2.7 | 76.94,2.7 76.62,2.7
  Bottom 0.305: v76.94,19.37 78.21,20.64 78.68,21.11 U7.P$14
SCL  (via drill 0.38 pad 0.99)
  Top 0.305: 25.6,12.22 v25.92,12.54 25.6,12.22 | 33.86,4.92 33.22,4.92 | 33.22,4.92 30.05,4.92 28.78,4.92 27.03,6.66 26.08,6.66 25.6,7.14 25.6,12.22 | U$4.9 36.4,2.85 35.76,3.49 34.33,4.92 33.22,4.92
  Bottom 0.305: v25.92,12.54 25.6,12.85 22.27,12.85 21,12.85 20.52,13.33 20.52,14.6 21.16,15.23 U3.P$24 18.3,17.46 18.14,17.46 17.98,17.46 16.71,16.19 I2C.2
SCL1  (via drill 0.38 pad 0.99)
  Top 0.305: 74.4,37.78 v74.08,37.47 74.4,37.78 | 66.14,45.09 66.78,45.09 | 66.78,45.09 69.95,45.09 71.22,45.09 72.97,43.34 73.92,43.34 74.4,42.86 74.4,37.78 | U$8.9 63.6,47.15 64.24,46.51 65.67,45.09 66.78,45.09
  Bottom 0.305: v74.08,37.47 74.4,37.15 77.73,37.15 79,37.15 79.48,36.67 79.48,35.4 78.84,34.77 U7.P$24 81.7,32.54 81.86,32.54 82.02,32.54 83.29,33.81 I2C1.2
SDA  (via drill 0.38 pad 0.99)
  Top 0.305: v25.92,5.71 26.87,5.71 27.03,5.71 28.46,4.28 29.73,4.28 32.43,4.28 33.86,2.85 U$4.8 | v19.41,5.87 17.03,5.87 16.24,6.66 16.24,18.09 15.6,18.73 I2C.1
  Bottom 0.305: v25.92,5.71 25.6,5.39 22.59,5.39 21.16,6.82 20.36,6.82 20.05,6.82 19.41,6.18 v19.41,5.87 | U3.P$23 16.24,20 I2C.1
SDA1  (via drill 0.38 pad 0.99)
  Top 0.305: v74.08,44.29 73.13,44.29 72.97,44.29 71.54,45.72 70.27,45.72 67.57,45.72 66.14,47.15 U$8.8 | v80.59,44.13 82.97,44.13 83.76,43.34 83.76,31.91 84.4,31.27 I2C1.1
  Bottom 0.305: v74.08,44.29 74.4,44.61 77.41,44.61 78.84,43.18 79.64,43.18 79.95,43.18 80.59,43.81 v80.59,44.13 | U7.P$23 83.76,30 I2C1.1
SHIFT_CS
  Top 0.305: U3.P$8 35.13,31.43 35.76,32.06 37.83,32.06 38.3,32.54 IC_OUT.12 39.57,32.54 41.64,34.6 41.64,40.63 42.75,41.74 42.75,44.13 39.57,47.3 IC_IN.10
SHIFT_CS1
  Top 0.305: U7.P$8 64.87,18.57 64.24,17.94 62.17,17.94 61.7,17.46 IC_OUT1.12 60.43,17.46 58.36,15.4 58.36,9.37 57.25,8.26 57.25,5.87 60.43,2.7 IC_IN1.10
SHIFT_IN_LOAD
  Top 0.305: U3.P$9 35.29,33.97 35.76,34.44 35.76,39.05 36.24,39.52 37.35,39.52 37.67,39.84 37.67,42.86 38.3,43.49 IC_IN.13 IC_IN.12
SHIFT_IN_LOAD1
  Top 0.305: U7.P$9 64.71,16.03 64.24,15.56 64.24,10.95 63.76,10.48 62.65,10.48 62.33,10.16 62.33,7.14 61.7,6.51 IC_IN1.13 IC_IN1.12
SHIFT_OUT_ENABLE  (via drill 0.38 pad 0.99)
  Top 0.305: v36.24,31.11 38.82,31.11 IC_OUT.13 | v36.24,27.93 35.6,27.3 35.6,25.55 | U3.P$5 35.45,25.39 35.6,25.55 | 35.6,25.55 35.92,25.87 36.24,26.19 36.56,25.87 R4.2
  Bottom 0.305: v36.24,31.11 v36.24,27.93
SHIFT_OUT_ENABLE1  (via drill 0.38 pad 0.99)
  Top 0.305: v63.76,18.89 61.18,18.89 IC_OUT1.13 | v63.76,22.07 64.4,22.7 64.4,24.45 | U7.P$5 64.56,24.61 64.4,24.45 | 64.4,24.45 64.08,24.13 63.76,23.81 63.44,24.13 R10.2
  Bottom 0.305: v63.76,18.89 v63.76,22.07
SWITCH
  Top 0.305: SWITCH.1 27.4,42.27 R1.2
  Bottom 0.305: U3.P$26 23.7,38.57 SWITCH.1
SWITCH1
  Top 0.305: SWITCH1.1 72.6,7.73 R9.2
  Bottom 0.305: U7.P$26 76.3,11.43 SWITCH1.1

## Text on the board
tPlace: MISO | SCK | MOSI | I8 | GN | C2 | 5V | A5 | A4 | A3 | D3 | D5 | D6 | GN | 3V | 5V | D13 | D12 | D11 | I7 | 3V | I6 | + | SWITCH | + | - | + | GN | O8 | O4 | O7 | TD / MySensors / Main 1.0 | O3 | 5V | GN | 3V | O6 | O2 | I2C | 3V Pro Mini | 5V | GN | SDA | GN | I4 | ANT | LED | SCL | RFM69 | 3V | I3 | MAIN 5V | INPUT | 5V | I2 | C0 | C1 | C1 | C0 | I2 | 5V | INPUT | MAIN 5V | I3 | 3V | RFM69 | SCL | LED | ANT | I4 | GN | SDA | GN | 5V | 3V Pro Mini | I2C | O2 | O6 | 3V | GN | 5V | O3 | TD / MySensors / Main 1.0 | O7 | O4 | O8 | GN | + | - | + | SWITCH | + | I6 | 3V | I7 | D11 | D12 | D13 | 5V | 3V | GN | D6 | D5 | D3 | A3 | A4 | A5 | 5V | C2 | GN | I8 | MOSI | SCK | MISO
tNames: IC_IN | IC_OUT | IC_OUT | IC_IN
_tPlace: SPI | PIEZO | LED | ANT | GND | GND | ANT | LED | PIEZO | SPI
_tNames: C3 | C2 | R6 | R2 | C9 | C12 | C10 | D1 | R1 | U4 | C1 | C13 | C7 | C8 | C11 | U1 | C6 | R5 | U2 | C5 | R3 | R4 | C4 | C4 | R4 | R3 | C5 | U2 | R5 | C6 | U1 | C11 | C8 | C7 | C13 | C1 | U4 | R1 | D1 | C10 | C12 | C9 | R2 | R6 | C2 | C3